# EAGLE board 4-up (EAGLE 9.5.2)
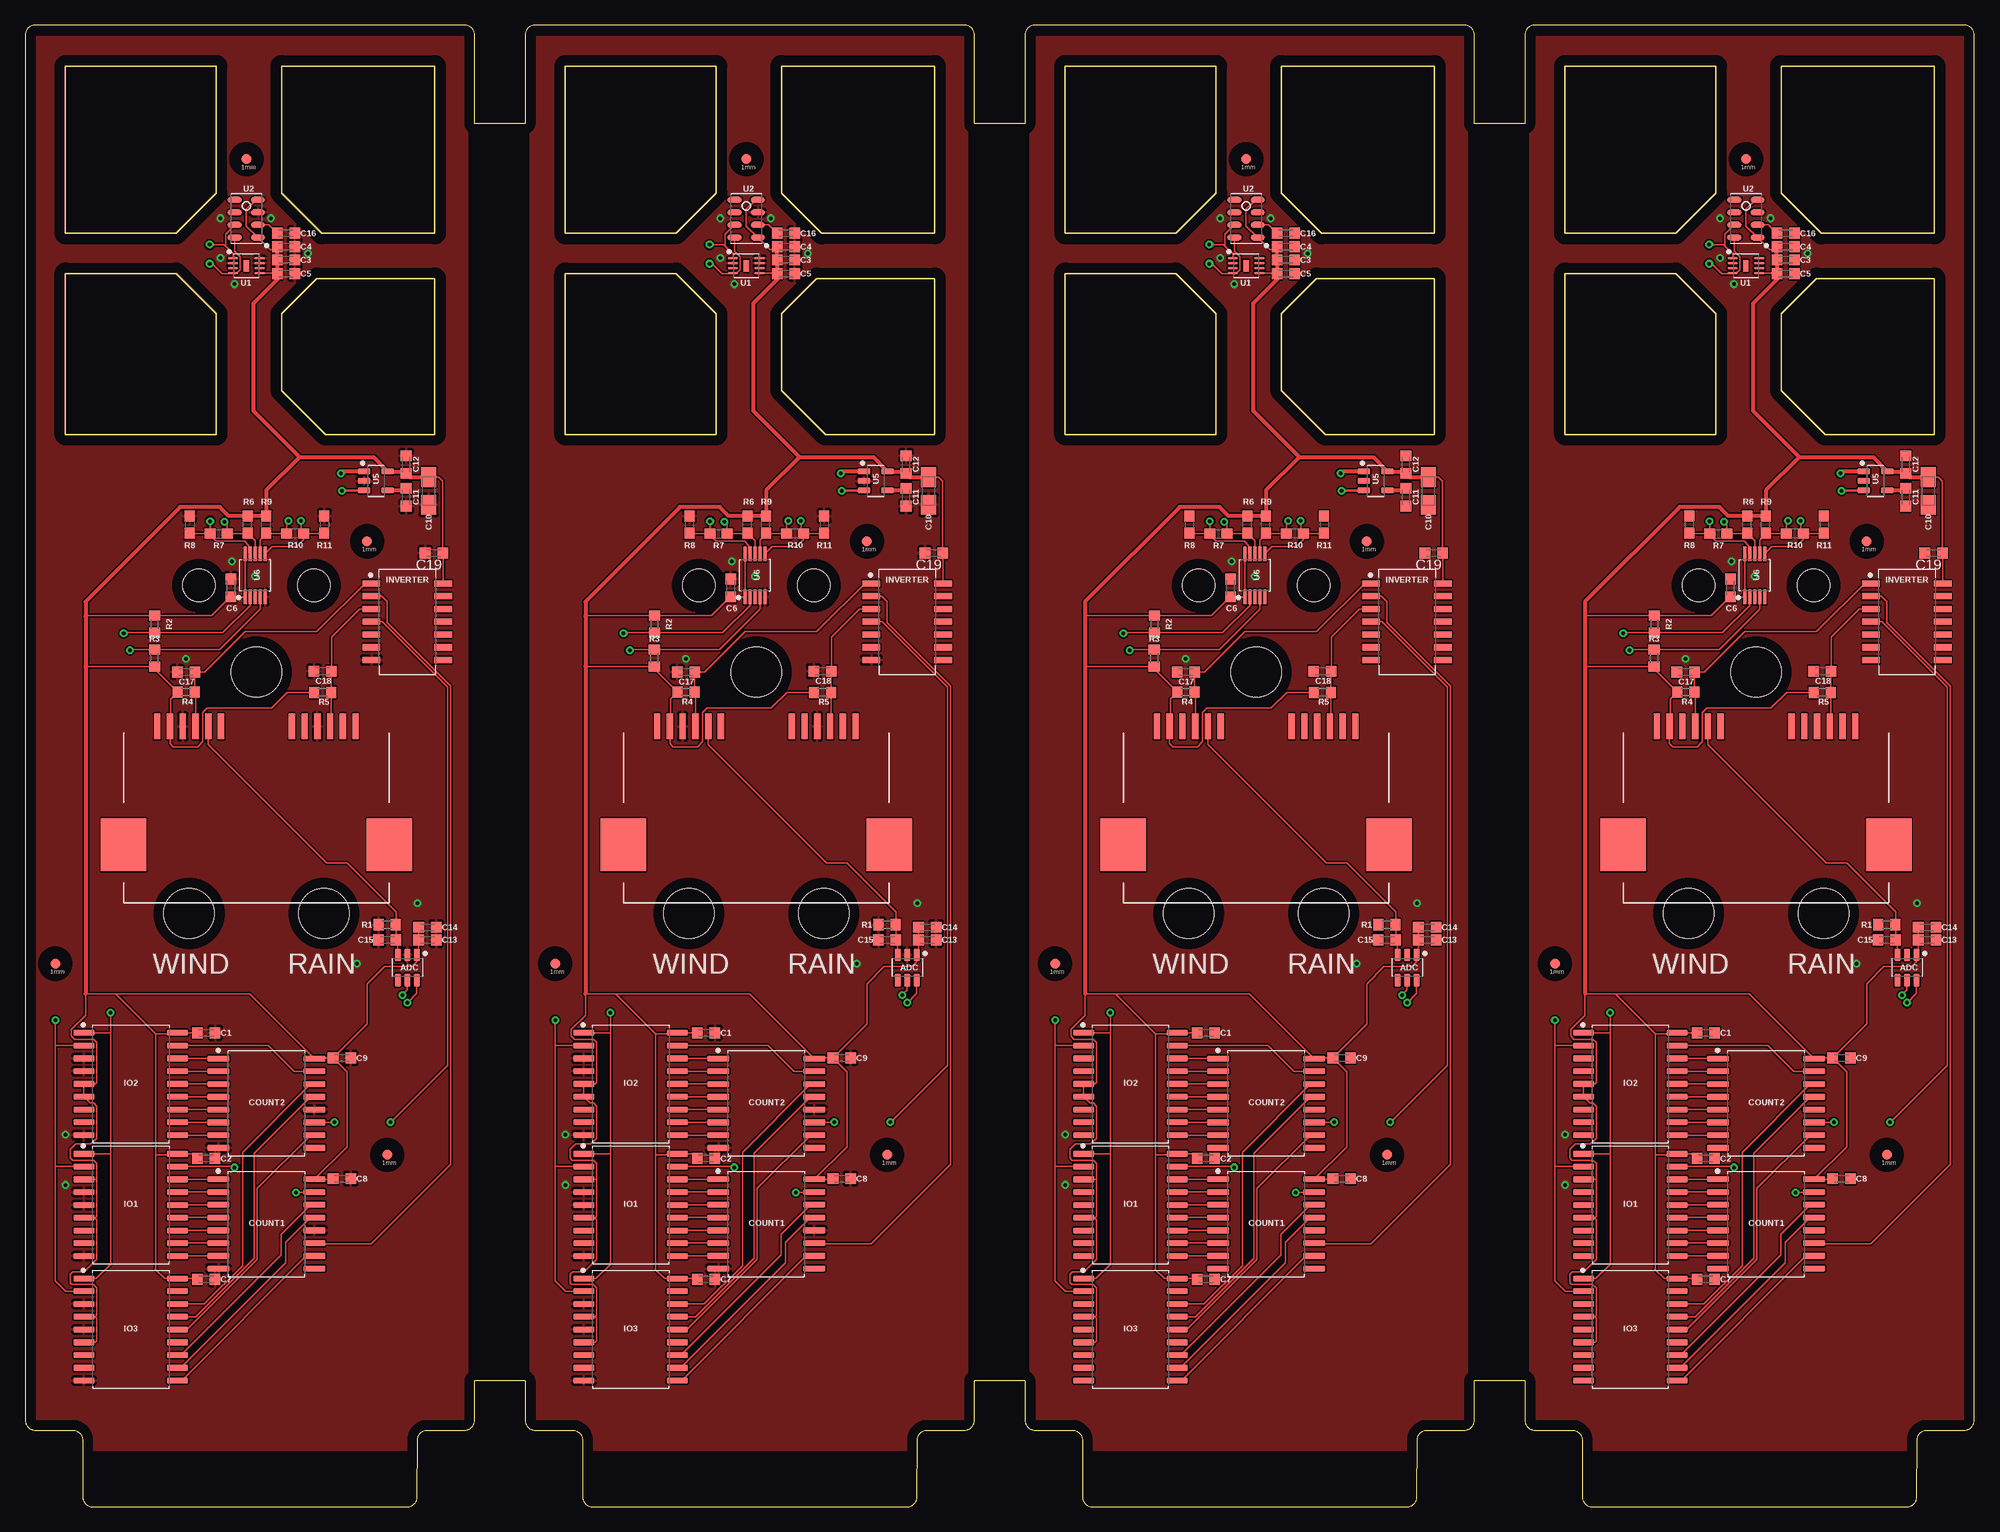
[diagram p0: board, top side]
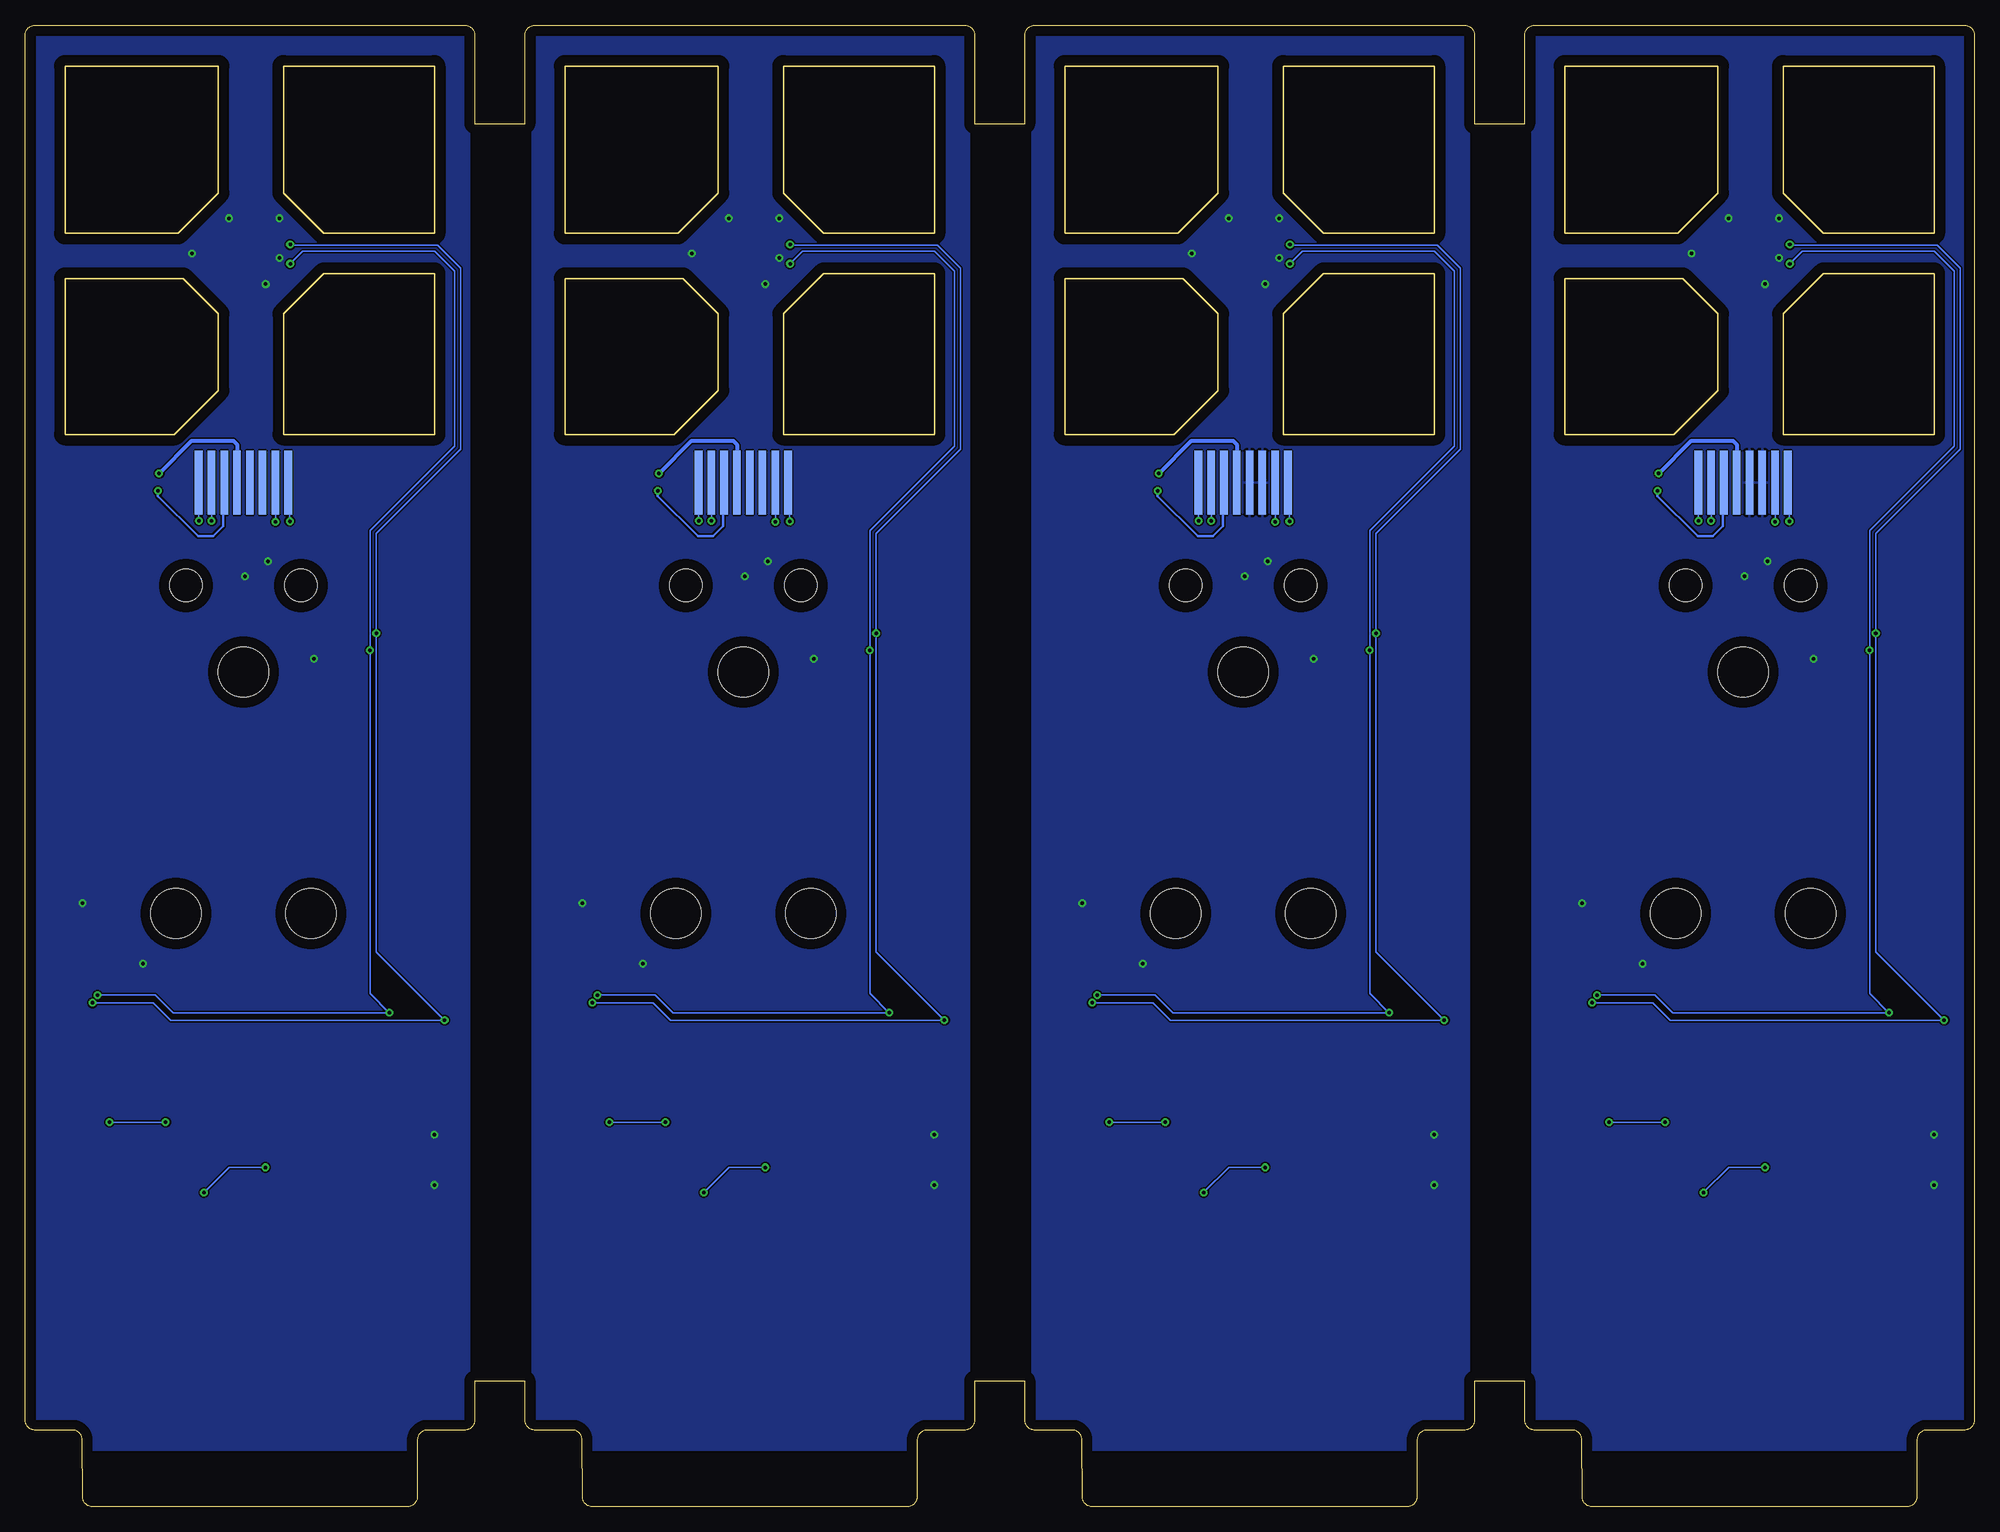
[diagram p1: board, bottom side, seen from below]

Size 193.8 x 147.32 mm. Coordinates in mm from the lower left corner, seen from the top.
Outline: 44.7,146.32 arc90 43.7,147.32 1,147.32 arc90 0,146.32 0,137.5 0,12.5 0,8.62 arc90 1,7.62 4.71,7.62 arc-90 5.71,6.62 5.71,1 arc90 6.71,0 37.99,0 arc90 38.99,1 39.01,6.62 arc-90 40.01,7.62 43.7,7.62 arc90 44.7,8.62 44.7,12.5 49.7,12.5 49.7,8.62 arc90 50.7,7.62 54.41,7.62 arc-90 55.41,6.62 55.41,1 arc90 56.41,0 87.69,0 arc90 88.69,1 88.71,6.62 arc-90 89.71,7.62 93.4,7.62 arc90 94.4,8.62 94.4,12.5 99.4,12.5 99.4,8.62 arc90 100.4,7.62 104.11,7.62 arc-90 105.11,6.62 105.11,1 arc90 106.11,0 137.39,0 arc90 138.39,1 138.41,6.62 arc-90 139.41,7.62 143.1,7.62 arc90 144.1,8.62 144.1,12.5 149.1,12.5 149.1,8.62 arc90 150.1,7.62 153.81,7.62 arc-90 154.81,6.62 154.81,1 arc90 155.81,0 187.09,0 arc90 188.09,1 188.11,6.62 arc-90 189.11,7.62 192.8,7.62 arc90 193.8,8.62 193.8,12.5 193.8,137.5 193.8,146.32 arc90 192.8,147.32 150.1,147.32 arc90 149.1,146.32 149.1,137.5 144.1,137.5 144.1,146.32 arc90 143.1,147.32 100.4,147.32 arc90 99.4,146.32 99.4,137.5 94.4,137.5 94.4,146.32 arc90 93.4,147.32 50.7,147.32 arc90 49.7,146.32 49.7,137.5 44.7,137.5 44.7,146.32
Outline: 15,126.62 19,130.62 19,143.24 4,143.24 4,126.62 15,126.62
Outline: 4,106.62 4,122.62 15,122.62 19,118.62 19,106.62 4,106.62
Outline: 29.5,126.62 25.5,130.62 25.5,143.24 40.73,143.24 40.73,126.62 29.5,126.62
Outline: 40.73,106.62 29.88,106.62 25.5,111 25.5,118.62 29,122.12 40.73,122.12 40.73,106.62
Outline: 64.7,126.62 68.7,130.62 68.7,143.24 53.7,143.24 53.7,126.62 64.7,126.62
Outline: 53.7,106.62 53.7,122.62 64.7,122.62 68.7,118.62 68.7,106.62 53.7,106.62
Outline: 79.2,126.62 75.2,130.62 75.2,143.24 90.43,143.24 90.43,126.62 79.2,126.62
Outline: 90.43,106.62 79.58,106.62 75.2,111 75.2,118.62 78.7,122.12 90.43,122.12 90.43,106.62
Outline: 114.4,126.62 118.4,130.62 118.4,143.24 103.4,143.24 103.4,126.62 114.4,126.62
Outline: 103.4,106.62 103.4,122.62 114.4,122.62 118.4,118.62 118.4,106.62 103.4,106.62
Outline: 128.9,126.62 124.9,130.62 124.9,143.24 140.13,143.24 140.13,126.62 128.9,126.62
Outline: 140.13,106.62 129.28,106.62 124.9,111 124.9,118.62 128.4,122.12 140.13,122.12 140.13,106.62
Outline: 164.1,126.62 168.1,130.62 168.1,143.24 153.1,143.24 153.1,126.62 164.1,126.62
Outline: 153.1,106.62 153.1,122.62 164.1,122.62 168.1,118.62 168.1,106.62 153.1,106.62
Outline: 178.6,126.62 174.6,130.62 174.6,143.24 189.83,143.24 189.83,126.62 178.6,126.62
Outline: 189.83,106.62 178.98,106.62 174.6,111 174.6,118.62 178.1,122.12 189.83,122.12 189.83,106.62
Copper layers (1*16): Top 0.035mm / dielectric 1.5mm / Bottom 0.035mm
Design rules "default *": minimum track width 6mil, minimum drill 0.35mm, track to track 6mil, track to pad 6mil, pad to pad 6mil, via to via 6mil, smd to smd 6mil, copper to edge 40mil, drill to drill 6mil, minimum pad ring 10mil, minimum via ring 8mil, stop-mask expansion 4mil, vias tented up to drill 0.35mm, thermal gap 10mil
Holes 5 mm at 23,83 16.3,59 29.7,59 72.7,83 66,59 79.4,59 122.4,83 115.7,59 129.1,59 172.1,83 165.4,59 178.8,59

## Footprints (pad centres in the part's own frame; a part is rotated, then mirrored left to right if it is on the bottom)
SOP95P280X110-6 = smd 1.25 x 0.602: 1 -1.256,0.95; 2 -1.256,0; 3 -1.256,-0.95; 4 1.256,-0.95; 5 1.256,0; 6 1.256,0.95
C0603K = smd 1.05 x 1.08: 1 -0.875,0; 2 0.875,0
A/3216-18R = smd 1.95 x 1.5: + 1.375,0; - -1.375,0
SOIC127P1050X265-16 = smd 2.187 x 0.602: 1 -4.76,4.445; 2 -4.76,3.175; 3 -4.76,1.905; 4 -4.76,0.635; 5 -4.76,-0.635; 6 -4.76,-1.905; 7 -4.76,-3.175; 8 -4.76,-4.445; 9 4.76,-4.445; 10 4.76,-3.175; 11 4.76,-1.905; 12 4.76,-0.635; 13 4.76,0.635; 14 4.76,1.905; 15 4.76,3.175; 16 4.76,4.445
FIDUCIAL-1X2.5 = smd 1 x 1: 1 0,0
SOIC127P780X200-14 = smd 1.774 x 0.605: 1 -3.567,3.81; 2 -3.567,2.54; 3 -3.567,1.27; 4 -3.567,0; 5 -3.567,-1.27; 6 -3.567,-2.54; 7 -3.567,-3.81; 8 3.567,-3.81; 9 3.567,-2.54; 10 3.567,-1.27; 11 3.567,0; 12 3.567,1.27; 13 3.567,2.54; 14 3.567,3.81
SOIC18-W = smd 2.052 x 0.602: 1 -4.654,5.08; 2 -4.654,3.81; 3 -4.654,2.54; 4 -4.654,1.27; 5 -4.654,0; 6 -4.654,-1.27; 7 -4.654,-2.54; 8 -4.654,-3.81; 9 -4.654,-5.08; 10 4.654,-5.08; 11 4.654,-3.81; 12 4.654,-2.54; 13 4.654,-1.27; 14 4.654,0; 15 4.654,1.27; 16 4.654,2.54; 17 4.654,3.81; 18 4.654,5.08
43841-0005 = smd 0.63 x 2.54: A1 -9.87,17.58; A2 -8.6,17.58; A3 -7.33,17.58; A4 -6.06,17.58; A5 -4.79,17.58; A6 -3.52,17.58; B1 3.52,17.58; B2 4.79,17.58; B3 6.06,17.58; B4 7.33,17.58; B5 8.6,17.58; B6 9.87,17.58 | smd 4.52 x 5.21: PAD1 -13.21,5.785; PAD2 13.21,5.785
95501-6889 = smd 0.76 x 6.35: 1 -4.445,10.225; 2 -3.175,10.225; 3 -1.905,10.225; 4 -0.635,10.225; 5 0.635,10.225; 6 1.905,10.225; 7 3.175,10.225; 8 4.445,10.225 | hole 3.25: -5.715,0; 5.715,0
R0603 = smd 1 x 1.1: 1 -0.85,0; 2 0.85,0
0603 = smd 1.1 x 1: 1 -0.85,0; 2 0.85,0
SON50P240X240X80-9T80 = smd 1 x 0.24: 1 -1.323,0.75; 2 -1.323,0.25; 3 -1.323,-0.25; 4 -1.323,-0.75; 5 1.322,-0.75; 6 1.322,-0.25; 7 1.322,0.25; 8 1.322,0.75 | smd 0.508 x 1.143: PAD 0,0
SON125P300X500X110-8 = smd 1.412 x 0.582: 1 -1.15,1.875; 2 -1.15,0.625; 3 -1.15,-0.625; 4 -1.15,-1.875; 5 1.15,-1.875; 6 1.15,-0.625; 7 1.15,0.625; 8 1.15,1.875
SOT95P280X145-5 = smd 1.262 x 0.609: 1 -1.175,0.95; 2 -1.175,0; 3 -1.175,-0.95; 4 1.175,-0.95; 5 1.175,0.95
SOP50P490X110-10 = smd 1.438 x 0.297: 1 -2.145,1; 2 -2.145,0.5; 3 -2.145,0; 4 -2.145,-0.5; 5 -2.145,-1; 6 2.145,-1; 7 2.145,-0.5; 8 2.145,0; 9 2.145,0.5; 10 2.145,1

## Placement (x,y rotation side)
ADC  ADC081C021SOT-DDC  [SOP95P280X110-6]  38,53.62 270 top
ADC1  ADC081C021SOT-DDC  [SOP95P280X110-6]  87.7,53.62 270 top
ADC2  ADC081C021SOT-DDC  [SOP95P280X110-6]  137.4,53.62 270 top
ADC3  ADC081C021SOT-DDC  [SOP95P280X110-6]  187.1,53.62 270 top
C1  .1uf  [C0603K]  18,47.12 0 top
C2  .1uf  [C0603K]  18,34.62 0 top
C3  .1uf  [C0603K]  25.94,123.98 0 top
C4  10uf  [C0603K]  25.94,125.29 0 top
C5  .1uf  [C0603K]  25.94,122.61 0 top
C6  .1uf  [C0603K]  20.46,91.37 90 top
C7  .1uf  [C0603K]  18,22.62 180 top
C8  .1uf  [C0603K]  31.5,32.62 0 top
C9  .1uf  [C0603K]  31.5,44.62 0 top
C10  6.8uf  [A/3216-18R]  40.12,101 90 top
C11  470pf  [C0603K]  37.88,100.37 270 top
C12  .1uf  [C0603K]  37.88,103.63 90 top
C13  .1uf  [C0603K]  40,56.37 0 top
C14  4.7u  [C0603K]  40,57.62 0 top
C15  470p  [C0603K]  36,56.37 180 top
C16  .1uf  [C0603K]  25.94,126.62 0 top
C17  1uf  [C0603K]  16,83 180 top
C18  1uf  [C0603K]  29.59,83.07 180 top
C19  .1uf  [C0603K]  40.65,94.83 180 top
C20  .1uf  [C0603K]  67.7,47.12 0 top
C21  .1uf  [C0603K]  67.7,34.62 0 top
C22  .1uf  [C0603K]  75.64,123.98 0 top
C23  10uf  [C0603K]  75.64,125.29 0 top
C24  .1uf  [C0603K]  75.64,122.61 0 top
C25  .1uf  [C0603K]  70.16,91.37 90 top
C26  .1uf  [C0603K]  67.7,22.62 180 top
C27  .1uf  [C0603K]  81.2,32.62 0 top
C28  .1uf  [C0603K]  81.2,44.62 0 top
C29  6.8uf  [A/3216-18R]  89.82,101 90 top
C30  470pf  [C0603K]  87.58,100.37 270 top
C31  .1uf  [C0603K]  87.58,103.63 90 top
C32  .1uf  [C0603K]  89.7,56.37 0 top
C33  4.7u  [C0603K]  89.7,57.62 0 top
C34  470p  [C0603K]  85.7,56.37 180 top
C35  .1uf  [C0603K]  75.64,126.62 0 top
C36  1uf  [C0603K]  65.7,83 180 top
C37  1uf  [C0603K]  79.29,83.07 180 top
C38  .1uf  [C0603K]  90.35,94.83 180 top
C39  .1uf  [C0603K]  117.4,47.12 0 top
C40  .1uf  [C0603K]  117.4,34.62 0 top
C41  .1uf  [C0603K]  125.34,123.98 0 top
C42  10uf  [C0603K]  125.34,125.29 0 top
C43  .1uf  [C0603K]  125.34,122.61 0 top
C44  .1uf  [C0603K]  119.86,91.37 90 top
C45  .1uf  [C0603K]  117.4,22.62 180 top
C46  .1uf  [C0603K]  130.9,32.62 0 top
C47  .1uf  [C0603K]  130.9,44.62 0 top
C48  6.8uf  [A/3216-18R]  139.52,101 90 top
C49  470pf  [C0603K]  137.28,100.37 270 top
C50  .1uf  [C0603K]  137.28,103.63 90 top
C51  .1uf  [C0603K]  139.4,56.37 0 top
C52  4.7u  [C0603K]  139.4,57.62 0 top
C53  470p  [C0603K]  135.4,56.37 180 top
C54  .1uf  [C0603K]  125.34,126.62 0 top
C55  1uf  [C0603K]  115.4,83 180 top
C56  1uf  [C0603K]  128.99,83.07 180 top
C57  .1uf  [C0603K]  140.05,94.83 180 top
C58  .1uf  [C0603K]  167.1,47.12 0 top
C59  .1uf  [C0603K]  167.1,34.62 0 top
C60  .1uf  [C0603K]  175.04,123.98 0 top
C61  10uf  [C0603K]  175.04,125.29 0 top
C62  .1uf  [C0603K]  175.04,122.61 0 top
C63  .1uf  [C0603K]  169.56,91.37 90 top
C64  .1uf  [C0603K]  167.1,22.62 180 top
C65  .1uf  [C0603K]  180.6,32.62 0 top
C66  .1uf  [C0603K]  180.6,44.62 0 top
C67  6.8uf  [A/3216-18R]  189.22,101 90 top
C68  470pf  [C0603K]  186.98,100.37 270 top
C69  .1uf  [C0603K]  186.98,103.63 90 top
C70  .1uf  [C0603K]  189.1,56.37 0 top
C71  4.7u  [C0603K]  189.1,57.62 0 top
C72  470p  [C0603K]  185.1,56.37 180 top
C73  .1uf  [C0603K]  175.04,126.62 0 top
C74  1uf  [C0603K]  165.1,83 180 top
C75  1uf  [C0603K]  178.69,83.07 180 top
C76  .1uf  [C0603K]  189.75,94.83 180 top
COUNT1  74HC590  [SOIC127P1050X265-16]  24,28.12 0 top
COUNT2  74HC590  [SOIC127P1050X265-16]  24,40.12 0 top
COUNT3  74HC590  [SOIC127P1050X265-16]  73.7,28.12 0 top
COUNT4  74HC590  [SOIC127P1050X265-16]  73.7,40.12 0 top
COUNT5  74HC590  [SOIC127P1050X265-16]  123.4,28.12 0 top
COUNT6  74HC590  [SOIC127P1050X265-16]  123.4,40.12 0 top
COUNT7  74HC590  [SOIC127P1050X265-16]  173.1,28.12 0 top
COUNT8  74HC590  [SOIC127P1050X265-16]  173.1,40.12 0 top
FID1  FIDUCIAL1X2.5  [FIDUCIAL-1X2.5]  36,35 0 top
FID2  FIDUCIAL1X2.5  [FIDUCIAL-1X2.5]  34,96 0 top
FID3  FIDUCIAL1X2.5  [FIDUCIAL-1X2.5]  22,134 0 top
FID4  FIDUCIAL1X2.5  [FIDUCIAL-1X2.5]  3,54 0 top
FID5  FIDUCIAL1X2.5  [FIDUCIAL-1X2.5]  85.7,35 0 top
FID6  FIDUCIAL1X2.5  [FIDUCIAL-1X2.5]  83.7,96 0 top
FID7  FIDUCIAL1X2.5  [FIDUCIAL-1X2.5]  71.7,134 0 top
FID8  FIDUCIAL1X2.5  [FIDUCIAL-1X2.5]  52.7,54 0 top
FID9  FIDUCIAL1X2.5  [FIDUCIAL-1X2.5]  135.4,35 0 top
FID10  FIDUCIAL1X2.5  [FIDUCIAL-1X2.5]  133.4,96 0 top
FID11  FIDUCIAL1X2.5  [FIDUCIAL-1X2.5]  121.4,134 0 top
FID12  FIDUCIAL1X2.5  [FIDUCIAL-1X2.5]  102.4,54 0 top
FID13  FIDUCIAL1X2.5  [FIDUCIAL-1X2.5]  185.1,35 0 top
FID14  FIDUCIAL1X2.5  [FIDUCIAL-1X2.5]  183.1,96 0 top
FID15  FIDUCIAL1X2.5  [FIDUCIAL-1X2.5]  171.1,134 0 top
FID16  FIDUCIAL1X2.5  [FIDUCIAL-1X2.5]  152.1,54 0 top
INVERTER  74HC14  [SOIC127P780X200-14]  38,88 0 top
INVERTER1  74HC14  [SOIC127P780X200-14]  87.7,88 0 top
INVERTER2  74HC14  [SOIC127P780X200-14]  137.4,88 0 top
INVERTER3  74HC14  [SOIC127P780X200-14]  187.1,88 0 top
IO1  MCP23008  [SOIC18-W]  10.5,30.01 0 top
IO2  MCP23008  [SOIC18-W]  10.5,42.04 0 top
IO3  MCP23008  [SOIC18-W]  10.5,17.62 0 top
IO4  MCP23008  [SOIC18-W]  60.2,42.04 0 top
IO5  MCP23008  [SOIC18-W]  60.2,30.01 0 top
IO6  MCP23008  [SOIC18-W]  60.2,17.62 0 top
IO7  MCP23008  [SOIC18-W]  109.9,42.04 0 top
IO8  MCP23008  [SOIC18-W]  109.9,30.01 0 top
IO9  MCP23008  [SOIC18-W]  109.9,17.62 0 top
IO10  MCP23008  [SOIC18-W]  159.6,42.04 0 top
IO11  MCP23008  [SOIC18-W]  159.6,30.01 0 top
IO12  MCP23008  [SOIC18-W]  159.6,17.62 0 top
J1  43841-0005  [43841-0005]  23,60.02 0 top
J2  95501-6889  [95501-6889]  23,91.61 0 bottom
J3  95501-6889  [95501-6889]  72.7,91.61 0 bottom
J4  43841-0005  [43841-0005]  72.7,60.02 0 top
J5  95501-6889  [95501-6889]  122.4,91.61 0 bottom
J6  43841-0005  [43841-0005]  122.4,60.02 0 top
J7  95501-6889  [95501-6889]  172.1,91.61 0 bottom
J8  43841-0005  [43841-0005]  172.1,60.02 0 top
R1  10k  [R0603]  36,57.87 0 top
R2  4.7K  [R0603]  12.87,87.75 270 top
R3  4.7K  [R0603]  12.86,84.39 270 top
R4  10k  [R0603]  16,81 180 top
R5  10k  [R0603]  29.59,80.98 180 top
R6  330  [0603]  22.13,97.67 90 top
R7  100  [0603]  19.25,96.74 0 top
R8  300  [0603]  16.35,97.66 270 top
R9  330  [0603]  23.97,97.67 90 top
R10  100  [0603]  26.86,96.77 180 top
R11  300  [0603]  29.75,97.66 270 top
R12  10k  [R0603]  85.7,57.87 0 top
R13  4.7K  [R0603]  62.57,87.75 270 top
R14  4.7K  [R0603]  62.56,84.39 270 top
R15  10k  [R0603]  65.7,81 180 top
R16  10k  [R0603]  79.29,80.98 180 top
R17  330  [0603]  71.83,97.67 90 top
R18  100  [0603]  68.94,96.74 0 top
R19  300  [0603]  66.05,97.66 270 top
R20  330  [0603]  73.67,97.67 90 top
R21  100  [0603]  76.56,96.77 180 top
R22  300  [0603]  79.45,97.66 270 top
R23  10k  [R0603]  135.4,57.87 0 top
R24  4.7K  [R0603]  112.27,87.75 270 top
R25  4.7K  [R0603]  112.26,84.39 270 top
R26  10k  [R0603]  115.4,81 180 top
R27  10k  [R0603]  128.99,80.98 180 top
R28  330  [0603]  121.53,97.67 90 top
R29  100  [0603]  118.64,96.74 0 top
R30  300  [0603]  115.75,97.66 270 top
R31  330  [0603]  123.37,97.67 90 top
R32  100  [0603]  126.26,96.77 180 top
R33  300  [0603]  129.15,97.66 270 top
R34  10k  [R0603]  185.1,57.87 0 top
R35  4.7K  [R0603]  161.97,87.75 270 top
R36  4.7K  [R0603]  161.96,84.39 270 top
R37  10k  [R0603]  165.1,81 180 top
R38  10k  [R0603]  178.69,80.98 180 top
R39  330  [0603]  171.23,97.67 90 top
R40  100  [0603]  168.34,96.74 0 top
R41  300  [0603]  165.45,97.66 270 top
R42  330  [0603]  173.07,97.67 90 top
R43  100  [0603]  175.96,96.77 180 top
R44  300  [0603]  178.85,97.66 270 top
U1  SHT31  [SON50P240X240X80-9T80]  22,123.39 0 top
U2  MPL3115A2LGA8  [SON125P300X500X110-8]  22,128.08 180 top
U3  SHT31  [SON50P240X240X80-9T80]  71.7,123.39 0 top
U4  MPL3115A2LGA8  [SON125P300X500X110-8]  71.7,128.08 180 top
U5  MIC5219-3.3YM5-TR  [SOT95P280X145-5]  34.88,102 0 top
U6  PCA9615  [SOP50P490X110-10]  22.87,92.62 90 top
U7  MIC5219-3.3YM5-TR  [SOT95P280X145-5]  84.58,102 0 top
U8  PCA9615  [SOP50P490X110-10]  72.57,92.62 90 top
U9  SHT31  [SON50P240X240X80-9T80]  121.4,123.39 0 top
U10  MPL3115A2LGA8  [SON125P300X500X110-8]  121.4,128.08 180 top
U11  MIC5219-3.3YM5-TR  [SOT95P280X145-5]  134.28,102 0 top
U12  PCA9615  [SOP50P490X110-10]  122.27,92.62 90 top
U13  SHT31  [SON50P240X240X80-9T80]  171.1,123.39 0 top
U14  MPL3115A2LGA8  [SON125P300X500X110-8]  171.1,128.08 180 top
U15  MIC5219-3.3YM5-TR  [SOT95P280X145-5]  183.98,102 0 top
U16  PCA9615  [SOP50P490X110-10]  171.97,92.62 90 top

## Library data of the parts
ADC ADC1-ADC3 COUNT1-COUNT8 INVERTER INVERTER1-INVERTER3 IO1-IO12 J1-J8 U1-U16 = Conservify
C1-C76 = rcl; SPICEPREFIX: C
FID1-FID16 = microbuilder; BOM: EXCLUDE
R1-R5 R12-R16 R23-R27 R34-R38 = rcl; SPICEPREFIX: R
R6-R11 R17-R22 R28-R33 R39-R44 = SparkFun-Resistors; PROD_ID: RES-07828

## Nets
2CCLR: COUNT2.10 IO3.14
2CCLR1: COUNT4.10 IO6.14
2OE: COUNT2.14 IO3.16
2OE1: COUNT4.14 IO6.16
2RCLK: COUNT2.13 IO3.15
2RCLK1: COUNT4.13 IO6.15
3V1: ADC1.1 C20.1 C21.1 C22.1 C23.1 C24.1 C25.1 C26.2 C27.1 C28.1 C29.+ C31.1 C32.1 C33.1 C38.1 COUNT3.16 COUNT4.16 INVERTER1.14 IO4.5 IO4.6 IO4.18 IO5.3 IO5.6 IO5.18 IO6.4 IO6.6 IO6.18 J4.A2 R13.1 R14.2 R15.2 R16.2 R17.2 R20.2 U3.5 U4.1 U4.4 U7.5 U8.1 U8.10
3V3: ADC.1 C1.1 C2.1 C3.1 C4.1 C5.1 C6.1 C7.2 C8.1 C9.1 C10.+ C12.1 C13.1 C14.1 C19.1 COUNT1.16 COUNT2.16 INVERTER.14 IO1.3 IO1.6 IO1.18 IO2.5 IO2.6 IO2.18 IO3.4 IO3.6 IO3.18 J1.A2 R2.1 R3.2 R4.2 R5.2 R6.2 R9.2 U1.5 U2.1 U2.4 U5.5 U6.1 U6.10
!ANEM: COUNT1.11 INVERTER.2
!ANEM1: COUNT3.11 INVERTER1.2
!RAIN: COUNT2.11 INVERTER.4
!RAIN1: COUNT4.11 INVERTER1.4
ANEM: C17.1 INVERTER.1 J1.A4 R4.1
ANEM1: C36.1 INVERTER1.1 J4.A4 R15.1
CAP: C16.1 U2.2
CAP1: C35.1 U4.2
EN: U6.3
EN1: U8.3
ENABLE: J2.3 U5.3
ENABLE1: J3.3 U7.3
GND: ADC.2 C1.2 C2.2 C3.2 C4.2 C5.2 C6.2 C7.1 C8.2 C9.2 C10.- C11.2 C12.2 C13.2 C14.2 C15.2 C16.2 C17.2 C18.2 C19.2 COUNT1.8 COUNT1.12 COUNT2.8 COUNT2.12 INVERTER.7 IO1.4 IO1.5 IO1.9 IO2.3 IO2.4 IO2.9 IO3.3 IO3.5 IO3.9 J1.A3 J1.B3 J2.5 J2.6 R1.1 R8.1 R11.1 U1.2 U1.7 U1.8 U2.3 U5.2 U6.5
GND1: ADC1.2 C20.2 C21.2 C22.2 C23.2 C24.2 C25.2 C26.1 C27.2 C28.2 C29.- C30.2 C31.2 C32.2 C33.2 C34.2 C35.2 C36.2 C37.2 C38.2 COUNT3.8 COUNT3.12 COUNT4.8 COUNT4.12 INVERTER1.7 IO4.3 IO4.4 IO4.9 IO5.4 IO5.5 IO5.9 IO6.3 IO6.5 IO6.9 J3.5 J3.6 J4.A3 J4.B3 R12.1 R19.1 R22.1 U3.2 U3.7 U3.8 U4.3 U7.2 U8.5
LCL-M: J2.1 R10.1 R11.2 U6.6
LCL-M1: J3.1 R21.1 R22.2 U8.6
LCL-P: J2.2 R9.1 R10.2 U6.7
LCL-P1: J3.2 R20.1 R21.2 U8.7
LDA-M: J2.8 R7.1 R8.2 U6.9
LDA-M1: J3.8 R18.1 R19.2 U8.9
LDA-P: J2.7 R6.1 R7.2 U6.8
LDA-P1: J3.7 R17.1 R18.2 U8.8
N$1: COUNT2.15 IO2.17
N$2: COUNT2.1 IO2.16
N$3: COUNT2.2 IO2.15
N$4: COUNT2.3 IO2.14
N$5: COUNT2.4 IO2.13
N$6: COUNT2.5 IO2.12
N$7: COUNT2.6 IO2.11
N$8: COUNT2.7 IO2.10
N$9: COUNT1.15 IO1.17
N$10: COUNT1.1 IO1.16
N$11: COUNT4.15 IO4.17
N$12: COUNT1.2 IO1.15
N$13: COUNT1.3 IO1.14
N$14: COUNT1.4 IO1.13
N$15: COUNT1.5 IO1.12
N$16: COUNT1.6 IO1.11
N$17: COUNT1.7 IO1.10
N$18: COUNT1.14 IO3.12
N$19: COUNT1.13 IO3.11
N$20: COUNT1.10 IO3.10
N$21: COUNT4.1 IO4.16
N$22: COUNT4.2 IO4.15
N$23: C11.1 U5.4
N$24: COUNT4.3 IO4.14
N$25: COUNT4.4 IO4.13
N$26: COUNT4.5 IO4.12
N$27: COUNT4.6 IO4.11
N$28: COUNT4.7 IO4.10
N$29: COUNT3.15 IO5.17
N$30: COUNT3.1 IO5.16
N$31: COUNT3.2 IO5.15
N$32: COUNT3.3 IO5.14
N$33: COUNT3.4 IO5.13
N$34: COUNT3.5 IO5.12
N$35: COUNT3.6 IO5.11
N$36: COUNT3.7 IO5.10
N$37: COUNT3.14 IO6.12
N$38: COUNT3.13 IO6.11
N$39: COUNT3.10 IO6.10
N$40: C30.1 U7.4
RAIN: C18.1 INVERTER.3 J1.B4 R5.1
RAIN1: C37.1 INVERTER1.3 J4.B4 R16.1
SCL: ADC.5 IO1.1 IO2.1 IO3.1 R3.1 U1.4 U2.8 U6.4
SCL1: ADC1.5 IO4.1 IO5.1 IO6.1 R14.1 U3.4 U4.8 U8.4
SDA: ADC.6 IO1.2 IO2.2 IO3.2 R2.2 U1.1 U2.7 U6.2
SDA1: ADC1.6 IO4.2 IO5.2 IO6.2 R13.2 U3.1 U4.7 U8.2
UNREG: J2.4 U5.1
UNREG1: J3.4 U7.1
VANE: ADC.3 C15.1 J1.A5 R1.2
VANE1: ADC1.3 C34.1 J4.A5 R12.2

## Tracks (layer width: path | path; a pad name or v marks a point on that pad's centre or on a via)
2CCLR
  Top 0.152: COUNT2.10 28.38,36.95 23.09,31.65 23.09,24.58 16.12,17.62 IO3.14
2CCLR1
  Top 0.152: COUNT4.10 78.08,36.95 72.79,31.65 72.79,24.58 65.83,17.62 IO6.14
2CCLR2
  Top 0.152: 128.16,36.95 127.78,36.95 122.49,31.65 122.49,24.58 115.53,17.62 114.55,17.62
2CCLR3
  Top 0.152: 177.86,36.95 177.48,36.95 172.19,31.65 172.19,24.58 165.22,17.62 164.25,17.62
2OE
  Top 0.152: COUNT2.14 28.38,42.02 21.62,35.26 21.62,23.97 17.8,20.16 IO3.16
2OE1
  Top 0.152: COUNT4.14 78.08,42.02 71.32,35.26 71.32,23.97 67.5,20.16 IO6.16
2OE2
  Top 0.152: 128.16,42.02 127.78,42.02 121.02,35.26 121.02,23.97 117.2,20.16 114.55,20.16
2OE3
  Top 0.152: 177.86,42.02 177.48,42.02 170.72,35.26 170.72,23.97 166.9,20.16 164.25,20.16
2RCLK
  Top 0.152: COUNT2.13 28.38,40.76 22.77,35.14 22.77,24.7 16.96,18.89 IO3.15
2RCLK1
  Top 0.152: COUNT4.13 78.08,40.76 72.47,35.14 72.47,24.7 66.66,18.89 IO6.15
2RCLK2
  Top 0.152: 128.16,40.76 127.78,40.76 122.17,35.14 122.17,24.7 116.36,18.89 114.55,18.89
2RCLK3
  Top 0.152: 177.86,40.76 177.48,40.76 171.87,35.14 171.87,24.7 166.06,18.89 164.25,18.89
3V1
  Top 0.152: C23.1 74.77,125 74.06,125 U4.1 71.7,127.36 71.7,129 72.66,129.96 U4.4 | U3.5 74.74,122.64 C24.1 | 55.7,88.52 55.78,88.6 R13.1 68.27,88.6 C25.1 70.18,90.47 U8.1 U8.10 | 55.7,83.57 55.73,83.54 R14.2 62.56,83.29 R15.2 64.18,80.33 64.18,77.68 J4.A2 64.1,75.9 64.43,75.56 66.84,75.56 67.37,76.09 67.37,78.97 67.81,79.41 74.19,79.41 75.76,80.98 R16.2 78.78,80.64 | 56.8,32.51 56.8,34.14 56.5,34.45 54.41,34.45 54.19,34.66 54.19,35.51 54.75,36.07 56.23,36.07 56.8,36.64 56.8,39.83 56.5,40.13 56.19,40.13 IO4.6 IO4.5 56.66,42.04 56.8,42.19 56.8,46.18 56.5,46.48 54.61,46.48 54.29,46.8 54.29,47.45 55.7,48.85 55.7,51 58.7,51 | 56.8,32.51 56.8,28.88 56.66,28.74 IO5.6 56.61,28.74 56.8,28.54 56.8,24.6 55.58,23.38 54.45,23.38 54.19,23.12 54.19,22.27 54.36,22.11 56.45,22.11 56.8,21.75 56.8,19.04 56.66,18.89 | 56.66,18.89 IO6.4 | 56.66,18.89 56.8,18.75 56.8,16.5 56.66,16.35 IO6.6 | 58.7,51 62.7,47 | 62.7,47 62.7,35 | 62.7,35 62.7,23.67 62.65,23.62 63.58,22.7 IO6.18 66.75,22.7 C26.2 | 62.7,35 64.77,35 IO5.18 66.36,35.09 C21.1 | 62.7,47 64.73,47 IO4.18 C20.1 | C28.1 78.52,44.62 COUNT4.16 72.03,51 58.7,51 | C27.1 80.27,32.56 COUNT3.16 81.7,35.8 81.7,43.24 C28.1 | C28.1 83.7,47.99 83.7,52 85.42,53.72 88.18,53.72 88.65,54.19 ADC1.1 88.83,55.05 C32.1 C33.1 | INVERTER1.14 91.27,94.79 C38.1 91.22,101.99 90.83,102.38 89.7,102.38 | IO5.3 56.76,32.55 56.8,32.51
  Top 0.406: C29.+ 89.7,102.38 87.96,102.38 C31.1 87.38,102.95 U7.5 84.38,104.33 77.04,104.33 | 77.04,104.33 76.93,104.33 73.67,101.06 R20.2 R17.2 69.95,98.52 69.05,99.42 65.11,99.42 55.7,90 55.7,88.52 55.7,83.57 55.7,51 | 77.04,104.33 72.41,108.96 72.41,119.66 74.77,122.02 C24.1 C22.1 74.77,125
3V2
  Top 0.152: 124.47,125.29 124.47,125 123.75,125 122.55,126.2 121.4,127.36 121.4,129 122.36,129.96 122.55,129.96 | 122.72,122.64 124.44,122.64 124.47,122.61 | 105.4,88.52 105.48,88.6 112.27,88.6 117.97,88.6 119.86,90.49 119.88,90.47 121.27,90.47 121.27,94.76 | 105.4,83.57 105.43,83.54 112.26,83.54 112.26,83.29 114.55,81 113.88,80.33 113.88,77.68 113.8,77.6 113.8,75.9 114.13,75.56 116.55,75.56 117.07,76.09 117.07,78.97 117.51,79.41 123.89,79.41 125.46,80.98 128.14,80.98 128.48,80.64 | 106.5,32.51 106.5,34.14 106.2,34.45 104.11,34.45 103.89,34.66 103.89,35.51 104.45,36.07 105.93,36.07 106.5,36.64 106.5,39.83 106.2,40.13 105.89,40.13 105.25,40.77 105.25,42.04 106.36,42.04 106.5,42.19 106.5,46.18 106.2,46.48 104.31,46.48 103.99,46.8 103.99,47.45 105.4,48.85 105.4,51 108.4,51 | 106.5,32.51 106.5,28.88 106.36,28.74 105.25,28.74 106.31,28.74 106.5,28.54 106.5,24.6 105.28,23.38 104.15,23.38 103.89,23.12 103.89,22.27 104.06,22.11 106.15,22.11 106.5,21.75 106.5,19.04 106.36,18.89 | 106.36,18.89 105.25,18.89 | 106.36,18.89 106.5,18.75 106.5,16.5 106.36,16.35 105.25,16.35 | 108.4,51 112.4,47 | 112.4,47 112.4,35 | 112.4,35 112.4,23.67 112.35,23.62 113.28,22.7 114.55,22.7 116.44,22.7 116.53,22.62 | 112.4,35 114.47,35 114.55,35.09 116.06,35.09 116.53,34.62 | 112.4,47 114.43,47 114.55,47.12 116.52,47.12 116.53,47.12 | 130.03,44.62 128.22,44.62 128.16,44.56 121.72,51 108.4,51 | 130.03,32.62 129.97,32.56 128.16,32.56 131.4,35.8 131.4,43.24 130.03,44.62 | 130.03,44.62 133.4,47.99 133.4,52 135.12,53.72 137.88,53.72 138.35,54.19 138.35,54.88 138.53,55.05 138.53,56.37 138.53,57.62
  Top 0.152: 140.97,91.81 140.97,94.79 140.92,94.83 140.92,101.99 140.53,102.38 139.4,102.38 | 105.25,32.55 106.46,32.55 106.5,32.51
  Top 0.406: 139.52,102.38 139.4,102.38 137.66,102.38 137.28,102.75 137.08,102.95 135.46,102.95 134.08,104.33 126.74,104.33 | 126.74,104.33 126.63,104.33 123.37,101.06 123.37,98.52 121.53,98.52 119.65,98.52 118.75,99.42 114.81,99.42 105.4,90 105.4,88.52 105.4,83.57 105.4,51 | 126.74,104.33 122.11,108.96 122.11,119.66 124.47,122.02 124.47,122.61 124.47,123.98 124.47,125
3V3
  Top 0.152: C4.1 25.07,125 24.36,125 U2.1 22,127.36 22,129 22.95,129.96 U2.4 | U1.5 25.04,122.64 C5.1 | 6,88.52 6.08,88.6 R2.1 18.57,88.6 C6.1 20.48,90.47 U6.1 U6.10 | 6,83.57 6.03,83.54 R3.2 12.86,83.29 R4.2 14.48,80.33 14.48,77.68 J1.A2 14.4,75.9 14.73,75.56 17.14,75.56 17.67,76.09 17.67,78.97 18.11,79.41 24.49,79.41 26.06,80.98 R5.2 29.08,80.64 | 7.1,32.51 7.1,34.14 6.8,34.45 4.71,34.45 4.49,34.66 4.49,35.51 5.05,36.07 6.53,36.07 7.1,36.64 7.1,39.83 6.8,40.13 6.49,40.13 IO2.6 IO2.5 6.96,42.04 7.1,42.19 7.1,46.18 6.8,46.48 4.91,46.48 4.59,46.8 4.59,47.45 6,48.85 6,51 9,51 | 7.1,32.51 7.1,28.88 6.96,28.74 IO1.6 6.91,28.74 7.1,28.54 7.1,24.6 5.88,23.38 4.75,23.38 4.49,23.12 4.49,22.27 4.66,22.11 6.75,22.11 7.1,21.75 7.1,19.04 6.96,18.89 | 6.96,18.89 IO3.4 | 6.96,18.89 7.1,18.75 7.1,16.5 6.96,16.35 IO3.6 | 9,51 13,47 | 13,47 13,35 | 13,35 13,23.67 12.95,23.62 13.88,22.7 IO3.18 17.05,22.7 C7.2 | 13,35 15.06,35 IO1.18 16.66,35.09 C2.1 | 13,47 15.03,47 IO2.18 C1.1 | C9.1 28.82,44.62 COUNT2.16 22.32,51 9,51 | C8.1 30.57,32.56 COUNT1.16 32,35.8 32,43.24 C9.1 | C9.1 34,47.99 34,52 35.72,53.72 38.48,53.72 38.95,54.19 ADC.1 39.12,55.05 C13.1 C14.1 | INVERTER.14 41.57,94.79 C19.1 41.52,101.99 41.13,102.38 40,102.38 | IO1.3 7.06,32.55 7.1,32.51
  Top 0.406: C10.+ 40,102.38 38.26,102.38 C12.1 37.68,102.95 U5.5 34.68,104.33 27.34,104.33 | 27.34,104.33 27.23,104.33 23.97,101.06 R9.2 R6.2 20.25,98.52 19.35,99.42 15.41,99.42 6,90 6,88.52 6,83.57 6,51 | 27.34,104.33 22.7,108.96 22.7,119.66 25.07,122.02 C5.1 C3.1 25.07,125
3V4
  Top 0.152: 174.17,125.29 174.17,125 173.46,125 172.25,126.2 171.1,127.36 171.1,129 172.06,129.96 172.25,129.96 | 172.42,122.64 174.14,122.64 174.17,122.61 | 155.1,88.52 155.18,88.6 161.97,88.6 167.67,88.6 169.56,90.49 169.58,90.47 170.97,90.47 170.97,94.76 | 155.1,83.57 155.13,83.54 161.96,83.54 161.96,83.29 164.25,81 163.58,80.33 163.58,77.68 163.5,77.6 163.5,75.9 163.83,75.56 166.25,75.56 166.77,76.09 166.77,78.97 167.21,79.41 173.59,79.41 175.16,80.98 177.84,80.98 178.18,80.64 | 156.2,32.51 156.2,34.14 155.9,34.45 153.81,34.45 153.59,34.66 153.59,35.51 154.15,36.07 155.63,36.07 156.2,36.64 156.2,39.83 155.9,40.13 155.59,40.13 154.95,40.77 154.95,42.04 156.06,42.04 156.2,42.19 156.2,46.18 155.9,46.48 154.01,46.48 153.69,46.8 153.69,47.45 155.1,48.85 155.1,51 158.1,51 | 156.2,32.51 156.2,28.88 156.06,28.74 154.95,28.74 156.01,28.74 156.2,28.54 156.2,24.6 154.98,23.38 153.85,23.38 153.59,23.12 153.59,22.27 153.76,22.11 155.85,22.11 156.2,21.75 156.2,19.04 156.06,18.89 | 156.06,18.89 154.95,18.89 | 156.06,18.89 156.2,18.75 156.2,16.5 156.06,16.35 154.95,16.35 | 158.1,51 162.1,47 | 162.1,47 162.1,35 | 162.1,35 162.1,23.67 162.05,23.62 162.98,22.7 164.25,22.7 166.15,22.7 166.22,22.62 | 162.1,35 164.16,35 164.25,35.09 165.76,35.09 166.22,34.62 | 162.1,47 164.13,47 164.25,47.12 166.22,47.12 | 179.72,44.62 177.91,44.62 177.86,44.56 171.43,51 158.1,51 | 179.72,32.62 179.67,32.56 177.86,32.56 181.1,35.8 181.1,43.24 179.72,44.62 | 179.72,44.62 183.1,47.99 183.1,52 184.82,53.72 187.58,53.72 188.05,54.19 188.05,54.88 188.22,55.05 188.22,56.37 188.22,57.62
  Top 0.152: 190.67,91.81 190.67,94.79 190.62,94.83 190.62,101.99 190.24,102.38 189.1,102.38 | 154.95,32.55 156.16,32.55 156.2,32.51
  Top 0.406: 189.22,102.38 189.1,102.38 187.36,102.38 186.98,102.75 186.78,102.95 185.16,102.95 183.78,104.33 176.44,104.33 | 176.44,104.33 176.33,104.33 173.07,101.06 173.07,98.52 171.23,98.52 169.35,98.52 168.45,99.42 164.51,99.42 155.1,90 155.1,88.52 155.1,83.57 155.1,51 | 176.44,104.33 171.81,108.96 171.81,119.66 174.17,122.02 174.17,122.61 174.17,123.98 174.17,125
!ANEM
  Top 0.152: INVERTER.2 35.46,90.54 36,90 36,87.92 42.3,81.62 42.3,34.05 34.42,26.16 28.81,26.16 COUNT1.11
!ANEM1
  Top 0.152: INVERTER1.2 85.16,90.54 85.7,90 85.7,87.92 92,81.62 92,34.05 84.12,26.16 78.51,26.16 COUNT3.11
!ANEM2
  Top 0.152: 133.83,90.54 134.86,90.54 135.4,90 135.4,87.92 141.71,81.62 141.71,34.05 133.82,26.16 128.21,26.16 128.16,26.21
!ANEM3
  Top 0.152: 183.53,90.54 184.56,90.54 185.1,90 185.1,87.92 191.41,81.62 191.41,34.05 183.52,26.16 177.91,26.16 177.86,26.21
!RAIN  (via drill 0.35)
  Top 0.152: INVERTER.4 35.49,88 42,81.49 42,43.91 v36.32,38.23 | v30.73,38.23 30.72,38.22 COUNT2.11
  Bottom 0.152: v36.32,38.23 v30.73,38.23
!RAIN1  (via drill 0.35)
  Top 0.152: INVERTER1.4 85.19,88 91.7,81.49 91.7,43.91 v86.02,38.23 | v80.43,38.23 80.42,38.22 COUNT4.11
  Bottom 0.152: v86.02,38.23 v80.43,38.23
!RAIN2  (via drill 0.35)
  Top 0.152: 133.83,88 134.89,88 141.4,81.49 141.4,43.91 v135.72,38.23 | v130.13,38.23 130.12,38.22 128.16,38.22
  Bottom 0.152: v135.72,38.23 v130.13,38.23
!RAIN3  (via drill 0.35)
  Top 0.152: 183.53,88 184.59,88 191.1,81.49 191.1,43.91 v185.42,38.23 | v179.83,38.23 179.82,38.22 177.86,38.22
  Bottom 0.152: v185.42,38.23 v179.83,38.23
ANEM
  Top 0.152: J1.A4 16.94,80.91 R4.1 16.85,82.97 C17.1 17.88,83 21.88,87 29,87 34,92 34.24,92 INVERTER.1
ANEM1
  Top 0.152: J4.A4 66.64,80.91 R15.1 66.55,82.97 C36.1 67.58,83 71.58,87 78.7,87 83.7,92 83.94,92 INVERTER1.1
ANEM2
  Top 0.152: 116.34,77.6 116.34,80.91 116.25,81 116.25,82.97 116.28,83 117.28,83 121.28,87 128.4,87 133.4,92 133.64,92 133.83,91.81
ANEM3
  Top 0.152: 166.04,77.6 166.04,80.91 165.95,81 165.95,82.97 165.97,83 166.97,83 170.97,87 178.1,87 183.1,92 183.34,92 183.53,91.81
CAP
  Top 0.152: U2.2 24.23,127.45 C16.1
CAP1
  Top 0.152: U4.2 73.93,127.45 C35.1
CAP2
  Top 0.152: 122.55,127.45 123.63,127.45 124.47,126.62
CAP3
  Top 0.152: 172.25,127.45 173.33,127.45 174.17,126.62
ENABLE  (via drill 0.35)
  Top 0.254: v31.5,101 31.55,101.05 U5.3
  Bottom 0.254: J2.3 25,101.74 25,97.5 26,96.5 27.5,96.5 31.5,100.5 v31.5,101
ENABLE1  (via drill 0.35)
  Top 0.254: v81.2,101 81.25,101.05 U7.3
  Bottom 0.254: J3.3 74.7,101.74 74.7,97.5 75.7,96.5 77.2,96.5 81.2,100.5 v81.2,101
ENABLE2  (via drill 0.35)
  Top 0.254: v130.9,101 130.95,101.05 133.1,101.05
  Bottom 0.254: 124.31,101.83 124.4,101.74 124.4,97.5 125.4,96.5 126.9,96.5 130.9,100.5 v130.9,101
ENABLE3  (via drill 0.35)
  Top 0.254: v180.6,101 180.65,101.05 182.81,101.05
  Bottom 0.254: 174,101.83 174.1,101.74 174.1,97.5 175.1,96.5 176.6,96.5 180.6,100.5 v180.6,101
GND  (via drill 0.35)
  other vias: 24.45,128.12 19.42,128.12 19.42,124.16 28.11,124.62 20.79,121.57 4,37 4,32 39,60 33,54 16,84.33 22.86,92.53 20.56,94
  pour Top: 0.5,146.47 0.5,5.62 44,5.62 44,146.47
  pour Bottom: 0.5,146.47 0.5,5.62 44,5.62 44,146.47
GND1  (via drill 0.35)
  other vias: 74.15,128.12 69.12,128.12 69.12,124.16 77.81,124.62 70.49,121.57 53.7,37 53.7,32 88.7,60 82.7,54 65.7,84.33 72.56,92.53 70.26,94
  pour Top: 50.2,146.47 50.2,5.62 93.7,5.62 93.7,146.47
  pour Bottom: 50.2,146.47 50.2,5.62 93.7,5.62 93.7,146.47
GND2  (via drill 0.35)
  other vias: 123.85,128.12 118.82,128.12 118.82,124.16 127.51,124.62 120.19,121.57 103.4,37 103.4,32 138.4,60 132.4,54 115.4,84.33 122.26,92.53 119.96,94
  pour Top: 99.9,146.47 99.9,5.62 143.4,5.62 143.4,146.47
  pour Bottom: 99.9,146.47 99.9,5.62 143.4,5.62 143.4,146.47
GND3  (via drill 0.35)
  other vias: 173.55,128.12 168.52,128.12 168.52,124.16 177.21,124.62 169.89,121.57 153.1,37 153.1,32 188.1,60 182.1,54 165.1,84.33 171.96,92.53 169.66,94
  pour Top: 149.6,146.47 149.6,5.62 193.1,5.62 193.1,146.47
  pour Bottom: 149.6,146.47 149.6,5.62 193.1,5.62 193.1,146.47
LCL-M  (via drill 0.35)
  Top 0.152: R10.1 29.71,96.77 R11.2 | R10.1 27.43,97.05 v27.43,98.04 | U6.6 24.56,95.45 27,95.45 27.71,96.16 R10.1
  Bottom 0.152: J2.1 27.45,98.06 v27.43,98.04
LCL-M1  (via drill 0.35)
  Top 0.152: R21.1 79.42,96.77 R22.2 | R21.1 77.13,97.05 v77.13,98.04 | U8.6 74.26,95.45 76.7,95.45 77.41,96.16 R21.1
  Bottom 0.152: J3.1 77.14,98.06 v77.13,98.04
LCL-M2  (via drill 0.35)
  Top 0.152: 127.11,96.77 129.12,96.77 129.15,96.81 | 127.11,96.77 126.83,97.05 v126.83,98.04 | 123.27,94.76 123.96,95.45 126.4,95.45 127.11,96.16 127.11,96.77
  Bottom 0.152: 126.84,101.83 126.84,98.06 v126.83,98.04
LCL-M3  (via drill 0.35)
  Top 0.152: 176.81,96.77 178.81,96.77 178.85,96.81 | 176.81,96.77 176.53,97.05 v176.53,98.04 | 172.97,94.76 173.66,95.45 176.1,95.45 176.81,96.16 176.81,96.77
  Bottom 0.152: 176.54,101.83 176.54,98.06 v176.53,98.04
LCL-P  (via drill 0.35)
  Top 0.152: 24.02,96.77 R10.2 26.01,97.89 v26.16,98.04 | 24.02,96.77 R9.1 | U6.7 23.37,96.13 24.02,96.77
  Bottom 0.152: v26.16,98.04 26.16,101.82 J2.2
LCL-P1  (via drill 0.35)
  Top 0.152: 73.72,96.77 R21.2 75.71,97.89 v75.86,98.04 | 73.72,96.77 R20.1 | U8.7 73.07,96.13 73.72,96.77
  Bottom 0.152: v75.86,98.04 75.86,101.82 J3.2
LCL-P2  (via drill 0.35)
  Top 0.152: 123.42,96.77 125.41,96.77 125.41,97.89 v125.56,98.04 | 123.42,96.77 123.37,96.82 | 122.77,94.76 122.77,96.13 123.42,96.77
  Bottom 0.152: v125.56,98.04 125.56,101.82 125.58,101.83
LCL-P3  (via drill 0.35)
  Top 0.152: 173.12,96.77 175.11,96.77 175.11,97.89 v175.26,98.04 | 173.12,96.77 173.07,96.82 | 172.47,94.76 172.47,96.13 173.12,96.77
  Bottom 0.152: v175.26,98.04 175.26,101.82 175.28,101.83
LDA-M  (via drill 0.35)
  Top 0.152: R7.1 16.42,96.74 R8.2 | R7.1 18.39,96.61 19,96 21.83,96 22.25,95.58 22.25,94.89 U6.9 | R7.1 v18.39,98
  Bottom 0.152: v18.39,98 18.39,101.67 J2.8
LDA-M1  (via drill 0.35)
  Top 0.152: R18.1 66.12,96.74 R19.2 | R18.1 68.09,96.61 68.7,96 71.53,96 71.95,95.58 71.95,94.89 U8.9 | R18.1 v68.09,98
  Bottom 0.152: v68.09,98 68.09,101.67 J3.8
LDA-M2  (via drill 0.35)
  Top 0.152: 117.8,96.74 115.82,96.74 115.75,96.81 | 117.8,96.74 117.8,96.61 118.4,96 121.23,96 121.65,95.58 121.65,94.89 121.77,94.76 | 117.8,96.74 v117.8,98
  Bottom 0.152: v117.8,98 117.8,101.67 117.95,101.83
LDA-M3  (via drill 0.35)
  Top 0.152: 167.5,96.74 165.52,96.74 165.45,96.81 | 167.5,96.74 167.5,96.61 168.1,96 170.93,96 171.35,95.58 171.35,94.89 171.47,94.76 | 167.5,96.74 v167.5,98
  Bottom 0.152: v167.5,98 167.5,101.67 167.66,101.83
LDA-P  (via drill 0.35)
  Top 0.152: v19.81,97.92 20.09,97.63 R7.2 22.05,96.74 R6.1 22.87,96.07 U6.8
  Bottom 0.152: v19.81,97.92 J2.7
LDA-P1  (via drill 0.35)
  Top 0.152: v69.51,97.92 69.8,97.63 R18.2 71.75,96.74 R17.1 72.57,96.07 U8.8
  Bottom 0.152: v69.51,97.92 69.51,101.82 J3.7
LDA-P2  (via drill 0.35)
  Top 0.152: v119.21,97.92 119.5,97.63 119.5,96.74 121.45,96.74 121.53,96.82 122.27,96.07 122.27,94.76
  Bottom 0.152: v119.21,97.92 119.21,101.82 119.22,101.83
LDA-P3  (via drill 0.35)
  Top 0.152: v168.91,97.92 169.19,97.63 169.19,96.74 171.15,96.74 171.23,96.82 171.97,96.07 171.97,94.76
  Bottom 0.152: v168.91,97.92 168.91,101.82 168.93,101.83
N$1
  Top 0.152: COUNT2.15 26.73,43.3 24.18,45.85 IO2.17
N$2
  Top 0.152: IO2.16 15.17,44.56 COUNT2.1
N$3
  Top 0.152: IO2.15 15.17,43.3 COUNT2.2
N$4
  Top 0.152: IO2.14 15.17,42.02 COUNT2.3
N$5
  Top 0.152: IO2.13 15.17,40.76 COUNT2.4
N$6
  Top 0.152: IO2.12 15.17,39.48 COUNT2.5
N$7
  Top 0.152: IO2.11 15.17,38.22 COUNT2.6
N$8
  Top 0.152: IO2.10 15.17,36.95 COUNT2.7
N$9  (via drill 0.35)
  Top 0.152: v20.82,33.74 20.74,33.82 IO1.17 | v26.92,31.24 28.71,31.24 COUNT1.15
  Bottom 0.152: v20.82,33.74 24.43,33.74 v26.92,31.24
N$10
  Top 0.152: IO1.16 15.17,32.56 COUNT1.1
N$11
  Top 0.152: COUNT4.15 76.43,43.3 73.88,45.85 IO4.17
N$12
  Top 0.152: IO1.15 15.17,31.3 COUNT1.2
N$13
  Top 0.152: IO1.14 15.17,30.02 COUNT1.3
N$14
  Top 0.152: IO1.13 15.17,28.75 COUNT1.4
N$15
  Top 0.152: IO1.12 15.17,27.48 COUNT1.5
N$16
  Top 0.152: IO1.11 15.17,26.21 COUNT1.6
N$17
  Top 0.152: IO1.10 15.17,24.95 COUNT1.7
N$18
  Top 0.152: COUNT1.14 28.38,30.02 25.44,27.08 25.44,25.06 15.46,15.08 IO3.12
N$19
  Top 0.152: COUNT1.13 28.38,28.75 25.93,26.3 25.93,24.27 15.46,13.81 IO3.11
N$20
  Top 0.152: COUNT1.10 27.95,24.95 15.55,12.54 IO3.10
N$21
  Top 0.152: IO4.16 64.87,44.56 COUNT4.1
N$22
  Top 0.152: IO4.15 64.87,43.3 COUNT4.2
N$23
  Top 0.406: C11.1 37.68,101.05 U5.4
N$24
  Top 0.152: IO4.14 64.87,42.02 COUNT4.3
N$25
  Top 0.152: IO4.13 64.87,40.76 COUNT4.4
N$26
  Top 0.152: IO4.12 64.87,39.48 COUNT4.5
N$27
  Top 0.152: IO4.11 64.87,38.22 COUNT4.6
N$28
  Top 0.152: IO4.10 64.87,36.95 COUNT4.7
N$29  (via drill 0.35)
  Top 0.152: v70.52,33.74 70.44,33.82 IO5.17 | v76.62,31.24 78.41,31.24 COUNT3.15
  Bottom 0.152: v70.52,33.74 74.13,33.74 v76.62,31.24
N$30
  Top 0.152: IO5.16 64.87,32.56 COUNT3.1
N$31
  Top 0.152: IO5.15 64.87,31.3 COUNT3.2
N$32
  Top 0.152: IO5.14 64.87,30.02 COUNT3.3
N$33
  Top 0.152: IO5.13 64.87,28.75 COUNT3.4
N$34
  Top 0.152: IO5.12 64.87,27.48 COUNT3.5
N$35
  Top 0.152: IO5.11 64.87,26.21 COUNT3.6
N$36
  Top 0.152: IO5.10 64.87,24.95 COUNT3.7
N$37
  Top 0.152: COUNT3.14 78.08,30.02 75.14,27.08 75.14,25.06 65.16,15.08 IO6.12
N$38
  Top 0.152: COUNT3.13 78.08,28.75 75.62,26.3 75.62,24.27 65.16,13.81 IO6.11
N$39
  Top 0.152: COUNT3.10 77.65,24.95 65.25,12.54 IO6.10
N$40
  Top 0.406: C30.1 87.38,101.05 U7.4
N$41
  Top 0.152: 128.16,43.3 126.13,43.3 123.58,45.85 114.55,45.85
N$42
  Top 0.152: 114.55,44.58 114.57,44.56 118.64,44.56
N$43
  Top 0.152: 114.55,43.31 114.57,43.3 118.64,43.3
N$44
  Top 0.152: 114.55,42.04 114.57,42.02 118.64,42.02
N$45
  Top 0.152: 114.55,40.77 114.57,40.76 118.64,40.76
N$46
  Top 0.152: 114.55,39.5 114.57,39.48 118.64,39.48
N$47
  Top 0.152: 114.55,38.23 114.57,38.22 118.64,38.22
N$48
  Top 0.152: 114.55,36.96 114.57,36.95 118.64,36.95
N$49  (via drill 0.35)
  Top 0.152: v120.22,33.74 120.14,33.82 114.55,33.82 | v126.32,31.24 128.11,31.24 128.16,31.3
  Bottom 0.152: v120.22,33.74 123.83,33.74 v126.32,31.24
N$50
  Top 0.152: 114.55,32.55 114.57,32.56 118.64,32.56
N$51
  Top 0.152: 114.55,31.28 114.57,31.3 118.64,31.3
N$52
  Top 0.152: 114.55,30.01 114.57,30.02 118.64,30.02
N$53
  Top 0.152: 114.55,28.74 114.57,28.75 118.64,28.75
N$54
  Top 0.152: 114.55,27.47 114.57,27.48 118.64,27.48
N$55
  Top 0.152: 114.55,26.2 114.57,26.21 118.64,26.21
N$56
  Top 0.152: 114.55,24.93 114.57,24.95 118.64,24.95
N$57
  Top 0.152: 128.16,30.02 127.78,30.02 124.84,27.08 124.84,25.06 114.86,15.08 114.55,15.08
N$58
  Top 0.152: 128.16,28.75 127.78,28.75 125.33,26.3 125.33,24.27 114.86,13.81 114.55,13.81
N$59
  Top 0.152: 128.16,24.95 127.35,24.95 114.95,12.54 114.55,12.54
N$60
  Top 0.406: 137.28,101.25 137.08,101.05 135.46,101.05
N$61
  Top 0.152: 177.86,43.3 175.83,43.3 173.28,45.85 164.25,45.85
N$62
  Top 0.152: 164.25,44.58 164.27,44.56 168.34,44.56
N$63
  Top 0.152: 164.25,43.31 164.27,43.3 168.34,43.3
N$64
  Top 0.152: 164.25,42.04 164.27,42.02 168.34,42.02
N$65
  Top 0.152: 164.25,40.77 164.27,40.76 168.34,40.76
N$66
  Top 0.152: 164.25,39.5 164.27,39.48 168.34,39.48
N$67
  Top 0.152: 164.25,38.23 164.27,38.22 168.34,38.22
N$68
  Top 0.152: 164.25,36.96 164.27,36.95 168.34,36.95
N$69  (via drill 0.35)
  Top 0.152: v169.92,33.74 169.84,33.82 164.25,33.82 | v176.02,31.24 177.81,31.24 177.86,31.3
  Bottom 0.152: v169.92,33.74 173.53,33.74 v176.02,31.24
N$70
  Top 0.152: 164.25,32.55 164.27,32.56 168.34,32.56
N$71
  Top 0.152: 164.25,31.28 164.27,31.3 168.34,31.3
N$72
  Top 0.152: 164.25,30.01 164.27,30.02 168.34,30.02
N$73
  Top 0.152: 164.25,28.74 164.27,28.75 168.34,28.75
N$74
  Top 0.152: 164.25,27.47 164.27,27.48 168.34,27.48
N$75
  Top 0.152: 164.25,26.2 164.27,26.21 168.34,26.21
N$76
  Top 0.152: 164.25,24.93 164.27,24.95 168.34,24.95
N$77
  Top 0.152: 177.86,30.02 177.48,30.02 174.54,27.08 174.54,25.06 164.56,15.08 164.25,15.08
N$78
  Top 0.152: 177.86,28.75 177.48,28.75 175.03,26.3 175.03,24.27 164.56,13.81 164.25,13.81
N$79
  Top 0.152: 177.86,24.95 177.05,24.95 164.65,12.54 164.25,12.54
N$80
  Top 0.406: 186.98,101.25 186.78,101.05 185.16,101.05
RAIN
  Top 0.152: J1.B4 30.44,77.71 R5.1 30.44,83.05 C18.1 30.47,86.47 33.27,89.27 INVERTER.3
RAIN1
  Top 0.152: J4.B4 80.14,77.71 R16.1 80.14,83.05 C37.1 80.17,86.47 82.97,89.27 INVERTER1.3
RAIN2
  Top 0.152: 129.73,77.6 129.84,77.71 129.84,80.98 129.84,83.05 129.87,83.07 129.87,86.47 132.67,89.27 133.83,89.27
RAIN3
  Top 0.152: 179.43,77.6 179.54,77.71 179.54,80.98 179.54,83.05 179.57,83.07 179.57,86.47 182.37,89.27 183.53,89.27
SCL  (via drill 0.35)
  Top 0.152: U2.8 20.85,124.84 21.41,124.28 21.41,123 21.05,122.64 U1.4 20.66,122.62 19.6,122.62 18.62,123.6 v18.35,123.6 | IO3.1 7.08,22.7 8.5,24.12 8.5,35.12 | 8.5,35.12 8.5,47.12 | 8.5,47.12 v8.5,49.12 | IO1.1 8.47,35.09 8.5,35.12 | IO2.1 8.5,47.12 | ADC.5 38,51.37 v37.5,50.87 | U6.4 23.37,89.25 19.36,85.24 R3.1 10.5,85.24 v10.41,85.15
  Bottom 0.152: v37.5,50.87 31.75,50.87 30,49.12 v8.5,49.12 10.4,51.02 v10.4,85.15 v10.41,85.15 10.41,97.04 2,105.45 2,122.85 4,124.85 17.1,124.85 v18.35,123.6
SCL1  (via drill 0.35)
  Top 0.152: U4.8 70.55,124.84 71.11,124.28 71.11,123 70.75,122.64 U3.4 70.36,122.62 69.3,122.62 68.32,123.6 v68.05,123.6 | IO6.1 56.78,22.7 58.2,24.12 58.2,35.12 | 58.2,35.12 58.2,47.12 | 58.2,47.12 v58.2,49.12 | IO5.1 58.17,35.09 58.2,35.12 | IO4.1 58.2,47.12 | ADC1.5 87.7,51.37 v87.2,50.87 | U8.4 73.07,89.25 69.06,85.24 R14.1 60.2,85.24 v60.11,85.15
  Bottom 0.152: v87.2,50.87 81.45,50.87 79.7,49.12 v58.2,49.12 60.1,51.02 v60.1,85.15 v60.11,85.15 60.11,97.04 51.7,105.45 51.7,122.85 53.7,124.85 66.8,124.85 v68.05,123.6
SCL2  (via drill 0.35)
  Top 0.152: 120.25,126.2 120.25,124.84 120.81,124.28 120.81,123 120.45,122.64 120.08,122.64 120.06,122.62 119,122.62 118.02,123.6 v117.75,123.6 | 105.25,22.7 106.48,22.7 107.9,24.12 107.9,35.12 | 107.9,35.12 107.9,47.12 | 107.9,47.12 v107.9,49.12 | 105.25,35.09 107.87,35.09 107.9,35.12 | 105.25,47.12 107.9,47.12 | 137.4,52.36 137.4,51.37 v136.9,50.87 | 122.77,90.47 122.77,89.25 118.76,85.24 112.26,85.24 109.9,85.24 v109.81,85.15
  Bottom 0.152: v136.9,50.87 131.15,50.87 129.4,49.12 v107.9,49.12 109.8,51.02 v109.8,85.15 v109.81,85.15 109.81,97.04 101.4,105.45 101.4,122.85 103.4,124.85 116.5,124.85 v117.75,123.6
SCL3  (via drill 0.35)
  Top 0.152: 169.95,126.2 169.95,124.84 170.51,124.28 170.51,123 170.15,122.64 169.78,122.64 169.76,122.62 168.7,122.62 167.72,123.6 v167.45,123.6 | 154.95,22.7 156.18,22.7 157.6,24.12 157.6,35.12 | 157.6,35.12 157.6,47.12 | 157.6,47.12 v157.6,49.12 | 154.95,35.09 157.57,35.09 157.6,35.12 | 154.95,47.12 157.6,47.12 | 187.1,52.36 187.1,51.37 v186.6,50.87 | 172.47,90.47 172.47,89.25 168.46,85.24 161.96,85.24 159.6,85.24 v159.51,85.15
  Bottom 0.152: v186.6,50.87 180.85,50.87 179.1,49.12 v157.6,49.12 159.5,51.02 v159.5,85.15 v159.51,85.15 159.51,97.04 151.1,105.45 151.1,122.85 153.1,124.85 166.2,124.85 v167.45,123.6
SDA  (via drill 0.35)
  Top 0.152: 19.92,125.34 19.92,126.52 U2.7 | 19.92,125.34 20.68,124.58 U1.1 20.66,124.12 | v3,48.37 3,45.85 | 3,45.85 3,33.78 | 3,33.78 3,22.46 4.03,21.43 IO3.2 | IO2.2 3,45.85 | IO1.2 3.04,33.82 3,33.78 | ADC.6 38.95,51.03 v38.02,50.1 | U6.2 22.38,89.62 19.66,86.9 R2.2 9.85,86.9 v9.8,86.85 | v18.35,125.5 19.76,125.5 19.92,125.34
  Bottom 0.152: v38.02,50.1 31.98,50.1 30.25,48.37 v3,48.37 9.8,55.17 v9.8,86.85 9.8,96.75 1.4,105.15 1.4,123.15 3.7,125.45 18.3,125.45 v18.35,125.5
SDA1  (via drill 0.35)
  Top 0.152: 69.61,125.34 69.61,126.52 U4.7 | 69.61,125.34 70.38,124.58 U3.1 70.36,124.12 | v52.7,48.37 52.7,45.85 | 52.7,45.85 52.7,33.78 | 52.7,33.78 52.7,22.46 53.73,21.43 IO6.2 | IO4.2 52.7,45.85 | IO5.2 52.74,33.82 52.7,33.78 | ADC1.6 88.65,51.03 v87.72,50.1 | U8.2 72.08,89.62 69.36,86.9 R13.2 59.55,86.9 v59.5,86.85 | v68.05,125.5 69.46,125.5 69.61,125.34
  Bottom 0.152: v87.72,50.1 81.68,50.1 79.95,48.37 v52.7,48.37 59.5,55.17 v59.5,86.85 59.5,96.75 51.1,105.15 51.1,123.15 53.4,125.45 68,125.45 v68.05,125.5
SDA2  (via drill 0.35)
  Top 0.152: 119.32,125.34 119.32,126.52 120.25,127.45 | 119.32,125.34 120.08,124.58 120.08,124.14 120.06,124.12 | v102.4,48.37 102.4,45.85 | 102.4,45.85 102.4,33.78 | 102.4,33.78 102.4,22.46 103.43,21.43 105.25,21.43 | 105.25,45.85 102.4,45.85 | 105.25,33.82 102.44,33.82 102.4,33.78 | 138.35,52.36 138.35,51.03 v137.42,50.1 | 121.77,90.47 121.78,90.47 121.78,89.62 119.06,86.9 112.27,86.9 109.25,86.9 v109.2,86.85 | v117.75,125.5 119.16,125.5 119.32,125.34
  Bottom 0.152: v137.42,50.1 131.38,50.1 129.65,48.37 v102.4,48.37 109.2,55.17 v109.2,86.85 109.2,96.75 100.8,105.15 100.8,123.15 103.1,125.45 117.7,125.45 v117.75,125.5
SDA3  (via drill 0.35)
  Top 0.152: 169.02,125.34 169.02,126.52 169.95,127.45 | 169.02,125.34 169.78,124.58 169.78,124.14 169.76,124.12 | v152.1,48.37 152.1,45.85 | 152.1,45.85 152.1,33.78 | 152.1,33.78 152.1,22.46 153.13,21.43 154.95,21.43 | 154.95,45.85 152.1,45.85 | 154.95,33.82 152.14,33.82 152.1,33.78 | 188.05,52.36 188.05,51.03 v187.12,50.1 | 171.47,90.47 171.48,90.47 171.48,89.62 168.76,86.9 161.97,86.9 158.95,86.9 v158.9,86.85 | v167.45,125.5 168.86,125.5 169.02,125.34
  Bottom 0.152: v187.12,50.1 181.08,50.1 179.35,48.37 v152.1,48.37 158.9,55.17 v158.9,86.85 158.9,96.75 150.5,105.15 150.5,123.15 152.8,125.45 167.4,125.45 v167.45,125.5
UNREG  (via drill 0.35)
  Top 0.406: U5.1 31.58,102.95 v31.38,102.75
  Bottom 0.406: v31.38,102.75 28.13,106 24,106 23.64,105.64 23.64,102 J2.4
UNREG1  (via drill 0.35)
  Top 0.406: U7.1 81.28,102.95 v81.08,102.75
  Bottom 0.406: v81.08,102.75 77.83,106 73.7,106 73.33,105.64 73.33,102 J3.4
UNREG2  (via drill 0.35)
  Top 0.406: 133.1,102.95 130.98,102.95 v130.78,102.75
  Bottom 0.406: v130.78,102.75 127.53,106 123.4,106 123.03,105.64 123.03,102 123.03,101.83
UNREG3  (via drill 0.35)
  Top 0.406: 182.81,102.95 180.68,102.95 v180.48,102.75
  Bottom 0.406: v180.48,102.75 177.23,106 173.1,106 172.74,105.64 172.74,102 172.74,101.83
VANE
  Top 0.152: ADC.3 37.05,56.2 C15.1 36.88,57.84 | 36.88,57.84 R1.2 | J1.A5 18.21,75.79 30,64 32,64 36.88,59.12 36.88,57.84
VANE1
  Top 0.152: ADC1.3 86.75,56.2 C34.1 86.58,57.84 | 86.58,57.84 R12.2 | J4.A5 67.91,75.79 79.7,64 81.7,64 86.58,59.12 86.58,57.84
VANE2
  Top 0.152: 136.45,54.88 136.45,56.2 136.28,56.37 136.28,57.84 | 136.28,57.84 136.25,57.87 | 117.61,77.6 117.61,75.79 129.4,64 131.4,64 136.28,59.12 136.28,57.84
VANE3
  Top 0.152: 186.15,54.88 186.15,56.2 185.97,56.37 185.97,57.84 | 185.97,57.84 185.95,57.87 | 167.31,77.6 167.31,75.79 179.1,64 181.1,64 185.97,59.12 185.97,57.84

## Text on the board
tPlace: WIND | RAIN | WIND | RAIN | WIND | RAIN | WIND | RAIN
tNames: U2 | U2 | U2 | U2 | C16 | C16 | C16 | C16 | C4 | C4 | C4 | C4 | C3 | C3 | C3 | C3 | C5 | C5 | C5 | C5 | U1 | U1 | U1 | U1 | C12 | C12 | C12 | C12 | U5 | U5 | U5 | U5 | R6 | R9 | C11 | R6 | R9 | C11 | R6 | R9 | C11 | R6 | R9 | C11 | C10 | C10 | C10 | C10 | R8 | R7 | R10 | R11 | R8 | R7 | R10 | R11 | R8 | R7 | R10 | R11 | R8 | R7 | R10 | R11 | C19 | C19 | C19 | C19 | U6 | U6 | U6 | U6 | INVERTER | INVERTER | INVERTER | INVERTER | C6 | C6 | C6 | C6 | R2 | R2 | R2 | R2 | R3 | R3 | R3 | R3 | C17 | C18 | C17 | C18 | C17 | C18 | C17 | C18 | R4 | R5 | R4 | R5 | R4 | R5 | R4 | R5 | R1 | C14 | R1 | C14 | R1 | C14 | R1 | C14 | C15 | C13 | C15 | C13 | C15 | C13 | C15 | C13 | ADC | ADC | ADC | ADC | C1 | C1 | C1 | C1 | C9 | C9 | C9 | C9 | IO2 | IO2 | IO2 | IO2 | COUNT2 | COUNT2 | COUNT2 | COUNT2 | C2 | C2 | C2 | C2 | C8 | C8 | C8 | C8 | IO1 | IO1 | IO1 | IO1 | COUNT1 | COUNT1 | COUNT1 | COUNT1 | C7 | C7 | C7 | C7 | IO3 | IO3 | IO3 | IO3